# Altium PCB STM32F103&407VET6_1.PcbDoc
Units mil, origin at the board's own origin, x right, y up, seen from the top; angles counter-clockwise.
Board outline 1531.5 x 1531.5 mil, 2 copper layers (Top Layer, Bottom Layer); 23 components, 91 nets, 216 pads, 14 vias.
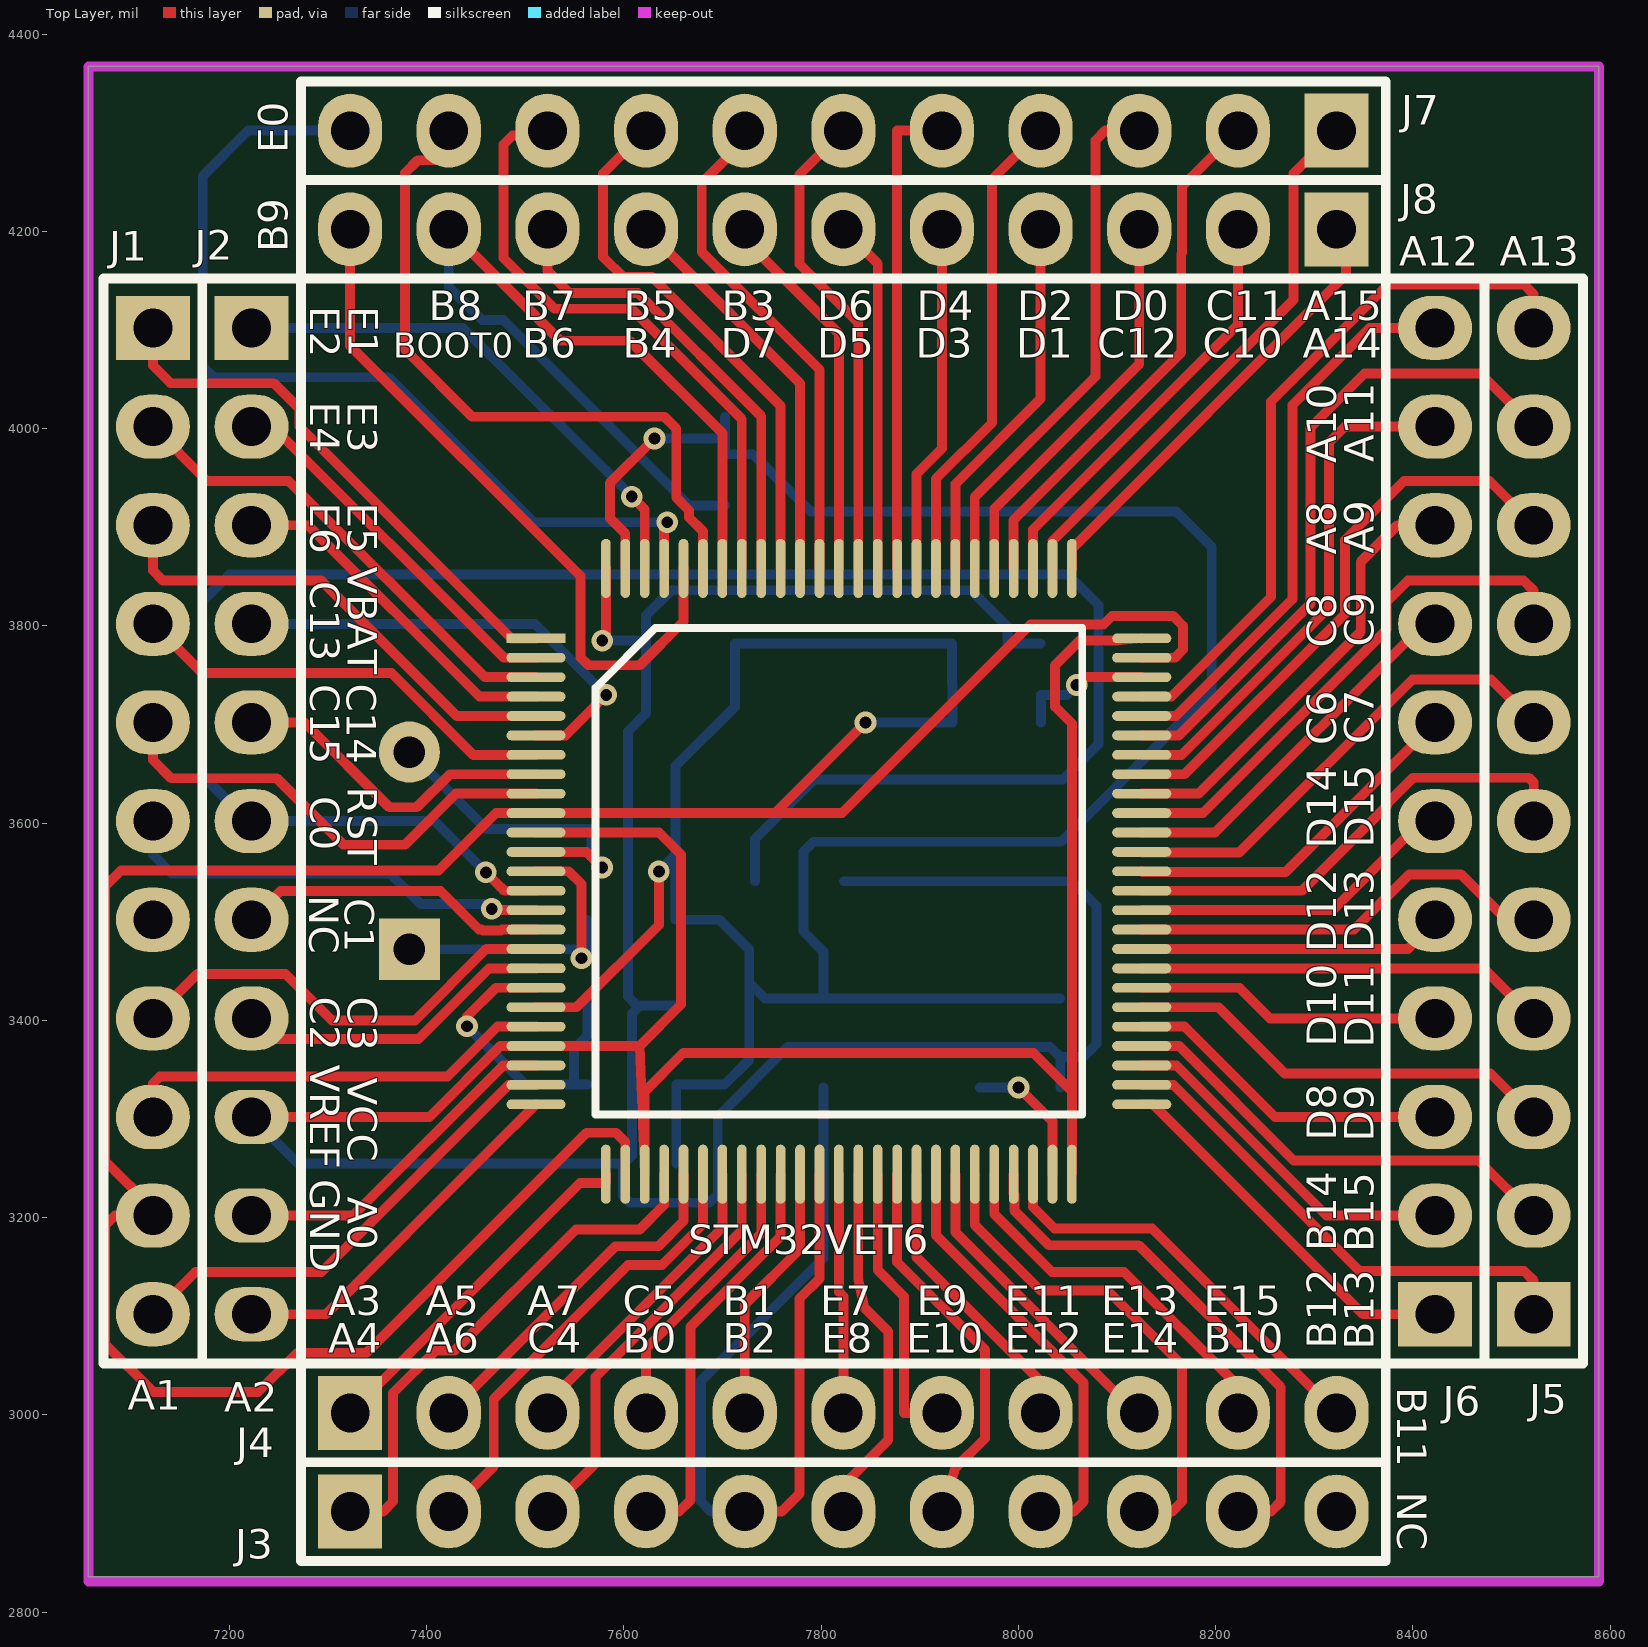
[diagram p0: Top Layer view]
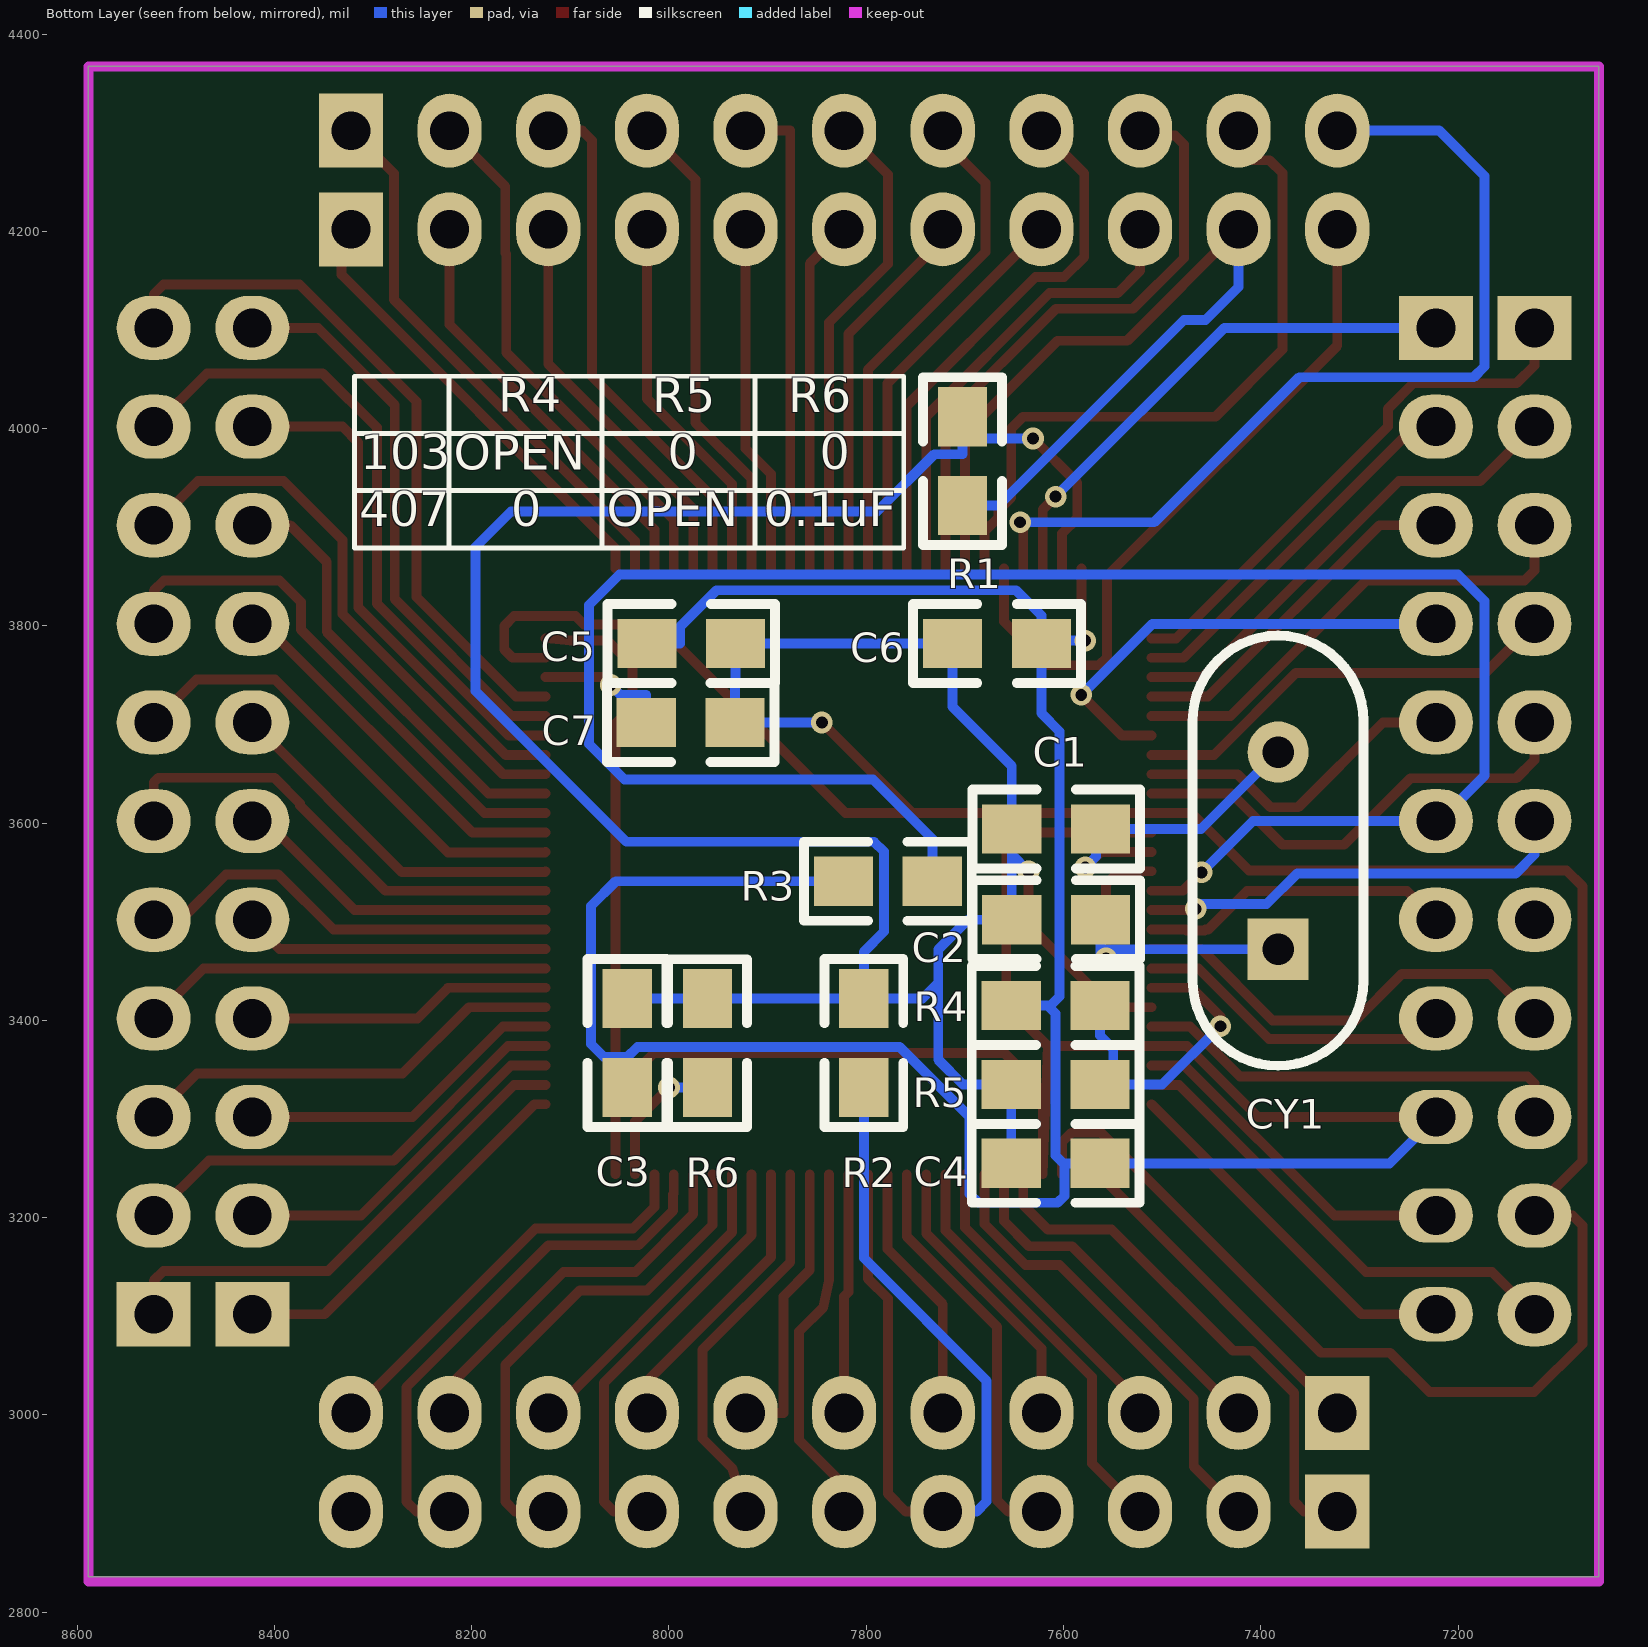
[diagram p1: Bottom Layer view, seen from below]

## Layer stack, top to bottom
Top Solder: solder mask 0.4, Solder Resist, Dk 3.5
Top Layer: signal copper 1.4
Dielectric1: dielectric 12.6, FR-4, Dk 4.8
Bottom Layer: signal copper 1.4
Bottom Solder: solder mask 0.4, Solder Resist, Dk 3.5

## Board outline
7057.09,4367.13 7057.09,2835.63 8588.58,2835.63 8588.58,4367.13

## Design rules (kind name [scope] priority, off if disabled: settings)
Clearance [All] p1: gap=6
FabricationTestPointUsage TestPointUsage [All] p1: valid=0 allowmultiple=FALSE
FabricationTestpoint Testpoint [All] p1: side=3 testpointundercomponent=TRUE minsize=40 maxsize=100 preferedsize=60 minholesize=0 maxholesize=40 preferedholesize=32 testpointgrid=1 allowsidetop=TRUE allowsidebottom=TRUE usegrid=TRUE gridtolerance=0.01
HoleSize [All] p1: absolutevalues=TRUE maxlimit=1000 minlimit=1 maxpercent=80.000 minpercent=20.000
HoleToHoleClearance [All] p1: gap=0 allowstackedmicrovias=TRUE
MinimumSolderMaskSliver [All] p1: minsoldermaskwidth=0
NetAntennae [All] p1: netantennaetolerance=1000
PlaneClearance [All] p1: clearance=10
PlaneConnect [All] p1: planeconnectstyle=Direct reliefexpansion=20 reliefentries=4 reliefconductorwidth=10 reliefairgap=10
PolygonConnect [All] p1: connectstyle=Direct reliefconductorwidth=30 reliefentries=4 polygonreliefangle="90 Angle" airgapwidth=10
RoutingVias [All] p1: holewidth=12 width=22 viastyle="Through Hole" minholewidth=12 minwidth=22 maxholewidth=50 maxwidth=100
ShortCircuit [All] p1: allowed=TRUE
SilkToSilkClearance [All] p1: silktosilkclearance=0
SilkToSolderMaskClearance SilkscreenOverComponentPads [IsPad] p1: minsilkscreentomaskgap=0 clearancetoexposedcopper=TRUE
SolderMaskExpansion [All] p1: expansion=2
Width [All] p1: maxlimit=100 minlimit=9 preferedwidth=10
19 further rules are at their usual default settings.

## Components (designator, comment, footprint, x,y, rotation, side; value= is the part's Value field where it differs from the comment)
C1 "30p" 0805 7562.44,3594.01 r0 bottom locked
C2 "30p" 0805 7562.44,3502.01 r0 bottom locked
C3 "104" 0805 8042.44,3422.01 r270 bottom locked
C4 "104" 0805 7563,3255 r0 bottom locked
C5 "104" 0805 8022.44,3782.01 r180 bottom locked
C6 "104" 0805 7622.44,3782.01 r0 bottom locked
C7 "104" 0805 7933,3702 r0 bottom locked
CY1 "8M" CY1 7382.44,3472.01 r90 bottom locked
J1 "CON11" SIP11#1 7122.44,4102.01 r270 top locked (schematic designator J1-1)
J2 "CON11" SIP11#2 7222.44,4102.01 r270 top locked (schematic designator J)
J3 "CON11" SIP11#1 7322.44,2902.01 r0 top locked
J4 "CON11" SIP11#1 7322.44,3002.01 r0 top locked
J5 "CON11" SIP11#1 8522.44,3102.01 r90 top locked
J6 "CON11" SIP11#1 8422.44,3102.01 r90 top locked
J7 "CON11" SIP11#1 8322.44,4302.01 r180 top locked
J8 "CON11" SIP11#1 8322.44,4202.01 r180 top locked
R1 "10k" 0805 7702.44,3922.01 r90 bottom locked
R2 "10k" 0805 7802.44,3422.01 r270 bottom locked
R3 "10k" 0805 7733,3541 r0 bottom locked
R4 "0" 0805 7563,3415 r0 bottom locked
R5 "0" 0805 7563,3335 r0 bottom locked
R6 "0" 0805 7961,3332 r90 bottom locked
STM32VET6 "Component_1" TQFP100 7510.84,3787.31 r0 top locked

## Footprints (in the part's own frame and the unit in brackets; to place one, negate y for a bottom-side part, rotate by r counter-clockwise, add the part's x,y. Pads: shape width x height; smd on the part's side, far side on the other; paste and mask are expansions set on the pad)
0805 [mil]
  rect 60x50 smd: 1(0,0) 2(90,0)
  silkscreen extent -40,-40 130,40
CY1 [mil]
  rect 62x62 hole 32: 1(0,0)
  round 62 hole 32: 2(200,0)
  silkscreen extent -118,-87 318,87
SIP11#1 [mil]
  rect 65x75 hole 39.37: 1(0,0)
  oval 65x75 hole 39.37: 2(100,0) 3(200,0) 4(300,0) 5(400,0) 6(500,0) 7(600,0) 8(700,0) 9(800,0) 10(900,0) 11(1000,0)
  silkscreen extent -50,-50 1050,50
SIP11#2 [mil]
  rect 65x75 hole 39.37: 1(0,0)
  oval 65x75 hole 39.37: 2(100,0) 3(200,0) 4(300,0) 5(400,0) 6(500,0) 7(600,0) 8(700,0)
  oval 55x75 hole 39.37: 9(800,0) 10(900,0) 11(1000,0)
  silkscreen extent -50,-50 1050,50
TQFP100 [mm]
  rect 1.524x0.25 smd: 1(0,0)
  oval 1.524x0.25 smd: 2(0,-0.5) 3(0,-1) 4(0,-1.5) 5(0,-2) 6(0,-2.5) 7(0,-3) 8(0,-3.5) 9(0,-4) 10(0,-4.5) 11(0,-5) 12(0,-5.5) 13(0,-6) 14(0,-6.5) 15(0,-7) 16(0,-7.5) 17(0,-8) 18(0,-8.5) 19(0,-9) 20(0,-9.5) 21(0,-10) 22(0,-10.5) 23(0,-11) 24(0,-11.5) 25(0,-12) 51(15.6,-12) 52(15.6,-11.5) 53(15.6,-11) 54(15.6,-10.5) 55(15.6,-10) 56(15.6,-9.5) 57(15.6,-9) 58(15.6,-8.5) 59(15.6,-8) 60(15.6,-7.5) 61(15.6,-7) 62(15.6,-6.5) 63(15.6,-6) 64(15.6,-5.5) 65(15.6,-5) 66(15.6,-4.5) 67(15.6,-4) 68(15.6,-3.5) 69(15.6,-3) 70(15.6,-2.5) 71(15.6,-2) 72(15.6,-1.5) 73(15.6,-1) 74(15.6,-0.5) 75(15.6,0)
  oval 0.25x1.524 smd: 26(1.8,-13.8) 27(2.3,-13.8) 28(2.8,-13.8) 29(3.3,-13.8) 30(3.8,-13.8) 31(4.3,-13.8) 32(4.8,-13.8) 33(5.3,-13.8) 34(5.8,-13.8) 35(6.3,-13.8) 36(6.8,-13.8) 37(7.3,-13.8) 38(7.8,-13.8) 39(8.3,-13.8) 40(8.8,-13.8) 41(9.3,-13.8) 42(9.8,-13.8) 43(10.3,-13.8) 44(10.8,-13.8) 45(11.3,-13.8) 46(11.8,-13.8) 47(12.3,-13.8) 48(12.8,-13.8) 49(13.3,-13.8) 50(13.8,-13.8) 76(13.8,1.8) 77(13.3,1.8) 78(12.8,1.8) 79(12.3,1.8) 80(11.8,1.8) 81(11.3,1.8) 82(10.8,1.8) 83(10.3,1.8) 84(9.8,1.8) 85(9.3,1.8) 86(8.8,1.8) 87(8.3,1.8) 88(7.8,1.8) 89(7.3,1.8) 90(6.8,1.8) 91(6.3,1.8) 92(5.8,1.8) 93(5.3,1.8) 94(4.8,1.8) 95(4.3,1.8) 96(3.8,1.8) 97(3.3,1.8) 98(2.8,1.8) 99(2.3,1.8) 100(1.8,1.8)
  silkscreen extent 1.54,-12.26 14.06,0.26

## Part data
C1 C2 C3 C4 C5 C6 C7: library part C1
CY1: library part CY1
R1 R2 R3 R4 R5 R6: library part R1

## Via types
v1: diameter 22, hole 12, Top Layer to Bottom Layer, 14 vias

## Nets (pads, with @x,y where several pads share a name; then routed paths per layer and width w, separated by ;. In a path a pad name is that pad's centre, name@x,y a point inside that pad or via, vN(x,y) a via of type N, cw(c..) or ccw(c..) an arc to the next point about the centre after c; other vN are vias at no path point)
BOOT0: J8.10 R1.1 STM32VET6.94 | length 930.3
  Top Layer w10: J8.10 7535.39,4089.06 7605.94,4089.06 7699.82,3995.18 STM32VET6.94
  Bottom Layer w10: J8.10 7422.44,4143.57 7456,4110.01 7478,4110.01 7666,3922.01 R1.1
GND: C1.2 C2.2 C3.1 C4.2 C5.2 C6.2 C7.1 J1.10 R1.2 R2.1 R5.2 R6.2 STM32VET6.10 STM32VET6.20 STM32VET6.27 STM32VET6.74 STM32VET6.99 | length 5829.7
  Top Layer w10: STM32VET6.20 7552,3413.29 7635.44,3496.73 v1(7635.44,3551) ; STM32VET6.27 7601.39,3276.61 7592,3286 7562,3286 7339,3063 7269,3063 7229,3023 7122.94,3023 7073.94,3072 7073.94,3192 7083.95,3202.01 J1.10 7122.44,3209 7073.94,3257.5 7073.94,3536 7089.94,3552 7412,3552 7470.14,3610.14 STM32VET6.10 7753.14,3610.14 ; STM32VET6.99 7601.39,3893.61 7586,3909 7586,3945 v1(7631,3990) ; v1(7845,3702) 7753.14,3610.14 ; STM32VET6.74 8158.62,3767.62 8167,3776 8167,3800 8157,3810 8094.89,3810 8086.07,3801.17 8012.17,3801.17 7821.14,3610.14 7753.14,3610.14
  Bottom Layer w10: v1(7631,3990) R1.2@7702.44,3990 ; v1(7635.44,3551) 7652.44,3568 ; C4.2 R5.2 7702,3335 7727,3360 7727,3438 ; R1.2 R1.2@7702.44,3990 ; v1(7845,3702) C7.1 7933,3741 7932.44,3741.56 C5.2 C6.2 7712.44,3718 7652.44,3658 C1.2 7652.44,3568 ; C3.1 8001.01,3422.01 R6.2 7881.01,3422 R2.1 ; 7652.44,3568 C2.2 7696.99,3502.01 7727,3472 7727,3438 ; R1.2@7702.44,3990 7702.44,3974 7731,3974 7789,3916 8160,3916 8196,3880 8196,3734 8043,3581 7792,3581 7782,3571 7782,3490 7802.44,3469.56 R2.1 ; 7727,3438 7742.99,3422.01 R2.1
NetC1_1: C1.1 CY1.2 STM32VET6.12 | length 334.1
  Top Layer w10: STM32VET6.12 7562.23,3570.77 v1(7578,3555)
  Bottom Layer w10: CY1.2 7460.44,3594.01 C1.1 7567,3594.01 7567,3566 v1(7578,3555)
NetC2_1: C2.1 CY1.1 STM32VET6.13 | length 347.9
  Top Layer w10: STM32VET6.13 7544,3551.09 7557,3538.09 v1(7557,3463)
  Bottom Layer w10: CY1.1 v1@7562.44,3472.01 ; v1(7557,3463) 7562.44,3468.44 v1@7562.44,3472.01 ; C2.1 v1@7562.44,3472.01
NetC7_2: C7.2 STM32VET6.73 | length 137.4
  Top Layer w10: v1(8059,3740) 8066.94,3747.94 STM32VET6.73
  Bottom Layer w10: C7.2 8023,3730 8049,3730 v1(8059,3740)
NetR4_1: R4.1 R5.1 STM32VET6.19 | length 323.9
  Top Layer w10: v1(7440.98,3394) 7440.98,3403.96 7470,3432.98 STM32VET6.19
  Bottom Layer w10: v1(7440.98,3394) 7499.98,3335 R5.1@7549.5,3335 ; R5.1 R5.1@7549.5,3335 ; R4.1 7563,3384.49 7549.5,3370.99 R5.1@7549.5,3335
NetR6_1: R6.1 STM32VET6.49 | length 141.3
  Top Layer w10: v1(8000,3332) 8034.46,3297.54 STM32VET6.49
  Bottom Layer w10: R6.1 v1(8000,3332)
PA0: J2.10 STM32VET6.23 | length 351.5
  Top Layer w10: J2.10 7325.35,3202.01 7477.58,3354.24 STM32VET6.23
PA1: J1.11 STM32VET6.24 | length 509.7
  Top Layer w10: J1.11@7122.44,3127 J1.11 7165.43,3145 7293.38,3145 7482.93,3334.55 STM32VET6.24
PA2: J2.11 STM32VET6.25 | length 376.6
  Top Layer w10: J2.11 7298,3102.01 7463.87,3267.88 STM32VET6.25
PA3: J4.1 STM32VET6.26 | length 364.8
  Top Layer w10: J4.1 7555.43,3235 7581.71,3235 STM32VET6.26
PA4: J3.1 STM32VET6.29 | length 542.7
  Top Layer w10: J3.1 7356.01,2902.01 7366,2912 7366,3022 7408.99,3064.99 7428.26,3064.99 7551.27,3188 7616,3188 7640.76,3212.76 STM32VET6.29
PA5: J4.2 STM32VET6.30 | length 366.1
  Top Layer w10: J4.2 7591.43,3171 7635,3171 7660.45,3196.45 STM32VET6.30
PA6: J3.2 STM32VET6.31 | length 469
  Top Layer w10: J3.2 7468,2947.57 7468,3016 7604,3152 7638.63,3152 7680.13,3193.5 STM32VET6.31
PA7: J4.3 STM32VET6.32 | length 340
  Top Layer w10: J4.3 7522.44,3012.51 7699.82,3189.89 STM32VET6.32
  Bottom Layer w10: J4.3 J4.3@7547,3002.01
PA8: J6.9 STM32VET6.67 | length 451.8
  Top Layer w10: STM32VET6.67 8182.83,3629.83 8347,3794 8347,3865.01 8384,3902.01 J6.9
PA9: J5.9 STM32VET6.68 | length 612.3
  Top Layer w10: STM32VET6.68@8154.17,3649.51 STM32VET6.68 8168.39,3649.51 8331,3812.12 8331,3887 8391,3947 8477.45,3947 J5.9
PA10: J6.10 STM32VET6.69 | length 533.3
  Top Layer w10: STM32VET6.69 8165.45,3669.2 8315,3818.75 8315,3986 8331.01,4002.01 J6.10
PA11: J5.10 STM32VET6.70 | length 683.9
  Top Layer w10: STM32VET6.70 8162.51,3688.88 8296,3822.37 8296,4001 8351,4056 8468.45,4056 J5.10 J5.10@8515.01,4002.01
PA12: J6.11 STM32VET6.71 | length 575.8
  Top Layer w10: STM32VET6.71 8159.57,3708.57 8278,3827 8278,4024 8356.01,4102.01 J6.11
PA13: J5.11 STM32VET6.72 | length 724.7
  Top Layer w10: STM32VET6.72 8155.01,3728.25 8256,3829.24 8256,4027.37 8374.63,4146 8512.44,4146 8522.44,4136 J5.11
PA14: J8.1 STM32VET6.76 | length 468.5
  Top Layer w10: STM32VET6.76 8054.15,3878.15 8332,4156 8332,4202.01 J8.1
PA15: J7.1 STM32VET6.77 | length 563.1
  Top Layer w10: STM32VET6.77 8034.46,3886.08 8278.94,4130.56 8278.94,4258.51 J7.1
PB0: J3.4 STM32VET6.35 | length 418.2
  Top Layer w10: J3.4 7656.01,2902.01 7667.43,2913.43 7667.43,3089.27 7758.87,3180.71 STM32VET6.35
PB1: J4.5 STM32VET6.36 | length 265.2
  Top Layer w10: J4.5 7722.44,3112.18 7778.56,3168.3 STM32VET6.36
PB2: J3.5 R2.2 STM32VET6.37 | length 915.5
  Top Layer w10: J3.5 7760.01,2902.01 7778,2920 7778,3117.82 7798.24,3138.06 STM32VET6.37
  Bottom Layer w10: J3.5 7687.99,2902.01 7678,2912 7678,3034.56 7802.44,3159 R2.2
PB3: J7.7 STM32VET6.89 | length 511.3
  Top Layer w10: J7.7 7722.44,4292.44 7678.94,4248.94 7678.94,4178.99 7798.24,4059.69 STM32VET6.89
PB4: J8.8 STM32VET6.90 | length 408.5
  Top Layer w10: J8.8 7778.56,4045.89 STM32VET6.90
PB5: J7.8 STM32VET6.91 | length 553.4
  Top Layer w10: J7.8 7578.94,4258.51 7578.94,4174.06 7599.49,4153.51 7628.49,4153.51 7758.87,4023.13 STM32VET6.91
PB6: J8.9 STM32VET6.92 | length 474.2
  Top Layer w10: J8.9 7522.44,4160 7544.93,4137.51 7614.15,4137.51 7739.19,4012.47 STM32VET6.92
PB7: J7.9 STM32VET6.93 | length 628.7
  Top Layer w10: J7.9 7522.44,4297 7487,4297 7478,4288 7478,4173 7529.49,4121.51 7607.49,4121.51 7719.5,4009.5 STM32VET6.93
PB8: J7.10 STM32VET6.95 | length 720
  Top Layer w10: J7.10 7422.44,4272 7391,4272 7378,4259 7378,4080 7446,4012 7641,4012 7653,4000 7653,3930 7666,3917 7666,3910 7680.13,3895.87 STM32VET6.95
PB9: J8.11 STM32VET6.96 | length 710.6
  Top Layer w10: J8.11 7322.44,4084 7556,3850.44 7556,3768 7564,3760 7616,3760 7660.45,3804.45 STM32VET6.96
PB10: J3.10 STM32VET6.47 | length 545.2
  Top Layer w10: STM32VET6.47 7995.09,3224.5 7996,3223.59 7996,3207 8031,3172 8122,3172 8265.94,3028.06 8265.94,2911.95 8256,2902.01 J3.10
PB11: J4.11 STM32VET6.48 | length 427.3
  Top Layer w10: STM32VET6.48 8014.78,3210.85 8036.63,3189 8135.45,3189 J4.11
PB12: J6.1 STM32VET6.51 | length 385.6
  Top Layer w10: STM32VET6.51 8136.53,3314.87 8349.39,3102.01 J6.1
PB13: J5.1 STM32VET6.52 | length 513.7
  Top Layer w10: STM32VET6.52 8157.19,3334.55 8345.74,3146 8512.44,3146 8522.44,3136 J5.1
PB14: J6.2 STM32VET6.53 | length 360.5
  Top Layer w10: STM32VET6.53 8160.13,3354.24 8312.36,3202.01 J6.2
PB15: J5.2 STM32VET6.54 | length 468.6
  Top Layer w10: STM32VET6.54 8163.08,3373.92 8279,3258 8466.45,3258 J5.2
PC0: J1.6 STM32VET6.15 | length 445.7
  Top Layer w10: v1(7466,3513) 7467.28,3511.72 STM32VET6.15
  Bottom Layer w10: J1.6 7122.44,3568 7141.44,3549 7363,3549 7394,3518 7461,3518 v1(7466,3513)
PC1: J2.7 STM32VET6.16 | length 317.6
  Top Layer w10: J2.7 7251.65,3531.21 7414,3531.21 7453.18,3492.03 7455.86,3492.03 7456.89,3491 7475.11,3491 7476.14,3492.03 STM32VET6.16
PC2: J1.8 STM32VET6.17 | length 456.5
  Top Layer w10: J1.8 7167.43,3447 7257,3447 7304,3400 7387.99,3400 7460.34,3472.35 STM32VET6.17
PC3: J2.8 STM32VET6.18 | length 326.8
  Top Layer w10: J2.8 7243.45,3381 7391.62,3381 7463.28,3452.66 STM32VET6.18
PC4: J3.3 STM32VET6.33 | length 454.6
  Top Layer w10: J3.3 7571,2950.57 7571,3038.44 7719.5,3186.94 STM32VET6.33
  Bottom Layer w10: J3.3@7522.44,2871 J3.3
PC5: J4.4 STM32VET6.34 | length 290.4
  Top Layer w10: J4.4 7622.44,3067.25 7739.19,3184 STM32VET6.34
PC6: J6.7 STM32VET6.63 | length 360.4
  Top Layer w10: STM32VET6.63 8125.53,3550.57 8271,3550.57 J6.7
PC7: J5.7 STM32VET6.64 | length 488.5
  Top Layer w10: STM32VET6.64 8125.78,3570 8223.91,3570 8399.42,3745.51 8478.94,3745.51 J5.7
PC8: J6.8 STM32VET6.65 | length 385.1
  Top Layer w10: STM32VET6.65 8199.46,3590.46 8411.01,3802.01 J6.8
PC9: J5.8 STM32VET6.66 | length 549.4
  Top Layer w10: STM32VET6.66 8187.14,3610.14 8373,3796 8373,3824 8395,3846 8512,3846 8522.44,3835.56 J5.8
PC10: J8.2 STM32VET6.78 | length 429.9
  Top Layer w10: STM32VET6.78 8014.78,3897.78 8222.44,4105.44 J8.2
PC11: J7.2 STM32VET6.79 | length 538
  Top Layer w10: STM32VET6.79 7995.09,3907.09 8165,4077 8165,4177.11 8165.94,4178.05 8165.94,4245.51 J7.2
PC12: J8.3 STM32VET6.80 | length 404.7
  Top Layer w10: STM32VET6.80 7975.41,3918.26 8122.44,4065.29 J8.3
PC13: J1.4 STM32VET6.7 | length 443.4
  Top Layer w10: J1.4 7172.44,3752 7364.47,3752 7447.27,3669.2 STM32VET6.7
PC14: J2.5 STM32VET6.8 | length 337.9
  Top Layer w10: J2.5 7275.99,3702.01 7362,3616 7390,3616 7423.51,3649.51 STM32VET6.8
PC15: J1.5 STM32VET6.9 | length 483.5
  Top Layer w10: J1.5 7122.44,3664 7140.93,3645.51 7248,3645.51 7315.51,3578 7378,3578 7429.83,3629.83 STM32VET6.9
PD0: J7.3 STM32VET6.81 | length 533.1
  Top Layer w10: STM32VET6.81 7955.72,3930.67 8078,4052.95 8078,4292.01 8088,4302.01 J7.3
PD1: J8.4 STM32VET6.82 | length 379.6
  Top Layer w10: STM32VET6.82 7936.04,3943.85 8022.44,4030.26 J8.4
PD2: J7.4 STM32VET6.83 | length 487.8
  Top Layer w10: STM32VET6.83 7916.35,3949.17 7973,4005.82 7973,4252.57 J7.4
PD3: J8.5 STM32VET6.84 | length 354.5
  Top Layer w10: STM32VET6.84 7896.67,3954 7922.44,3979.77 J8.5
PD4: J7.5 STM32VET6.85 | length 489.3
  Top Layer w10: STM32VET6.85 7876.98,4301.99 J7.5
PD5: J8.6 STM32VET6.86 | length 358.3
  Top Layer w10: J8.6 7857.3,4167.15 STM32VET6.86
PD6: J7.6 STM32VET6.87 | length 486.9
  Top Layer w10: J7.6 7778,4257.57 7778,4167 7837.61,4107.39 STM32VET6.87
PD7: J8.7 STM32VET6.88 | length 383.4
  Top Layer w10: J8.7 7722.44,4191.56 7817.93,4096.07 STM32VET6.88
PD8: J6.3 STM32VET6.55 | length 335.4
  Top Layer w10: STM32VET6.55 8168.4,3393.61 8260,3302.01 J6.3
PD9: J5.3 STM32VET6.56 | length 443.5
  Top Layer w10: STM32VET6.56 8202.75,3413.29 8270.04,3346 8478.45,3346 J5.3
PD10: J6.4 STM32VET6.57 | length 310.3
  Top Layer w10: STM32VET6.57 8224,3432.98 8254.97,3402.01 J6.4
PD11: J5.4 STM32VET6.58 | length 418.4
  Top Layer w10: STM32VET6.58 8471.79,3452.66 J5.4
PD12: J6.5 STM32VET6.59 | length 310.9
  Top Layer w10: STM32VET6.59 8394.79,3472.35 8422.44,3500 J6.5
PD13: J5.5 STM32VET6.60 | length 439.7
  Top Layer w10: STM32VET6.60 8340.24,3492.03 8396.21,3548 8449,3548 8494.99,3502.01 J5.5
PD14: J6.6 STM32VET6.61 | length 334.8
  Top Layer w10: STM32VET6.61 8318.72,3511.72 8409.01,3602.01 J6.6
PD15: J5.6 STM32VET6.62 | length 487.2
  Top Layer w10: STM32VET6.62 8287.4,3531.4 8373.94,3617.94 8373.94,3620.03 8399.91,3646 8517.44,3646 8522.44,3641 J5.6
PE0: J7.11 STM32VET6.97 | length 946.1
  Top Layer w10: STM32VET6.97 7640.76,3901.76 v1(7644,3905)
  Bottom Layer w10: J7.11 7219.01,4302.01 7173,4256 7173,4063 7184,4052 7361,4052 7508,3905 v1(7644,3905)
PE1: J2.1 STM32VET6.98 | length 534.6
  Top Layer w10: v1(7608,3931) 7621.08,3917.92 STM32VET6.98
  Bottom Layer w10: J2.1 7436.99,4102.01 v1(7608,3931)
PE2: J1.1 STM32VET6.1 | length 551.5
  Top Layer w10: J1.1 7122.44,4064 7140.44,4046 7244.97,4046 7270.94,4020.03 7270.94,4002.21 7485.84,3787.31 STM32VET6.1
PE3: J2.2 STM32VET6.2 | length 385.5
  Top Layer w10: J2.2 7243.83,4002.01 7478.22,3767.62 STM32VET6.2
PE4: J1.2 STM32VET6.3 | length 493.6
  Top Layer w10: J1.2 7177.45,3947 7259.88,3947 7458.94,3747.94 STM32VET6.3
PE5: J2.3 STM32VET6.4 | length 360.4
  Top Layer w10: J2.3 7279.75,3902.01 7453.51,3728.25 STM32VET6.4
PE6: J1.3 STM32VET6.5 | length 495.5
  Top Layer w10: J1.3 7122.44,3856 7132.44,3846 7293.1,3846 7430.53,3708.57 STM32VET6.5
PE7: J4.6 STM32VET6.38 | length 243.9
  Top Layer w10: STM32VET6.38 7817.93,3124.51 7822.44,3120 J4.6
PE8: J3.6 STM32VET6.39 | length 371.6
  Top Layer w10: J3.6 7822.44,2929 7868,2974.56 7868,3084.5 7843.59,3108.91 7837.61,3137.39 STM32VET6.39
PE9: J4.7 STM32VET6.40 | length 291.5
  Top Layer w10: STM32VET6.40 7857.3,3146.7 7884,3120 7884,3002.01 J4.7
PE10: J3.7 STM32VET6.41 | length 393.3
  Top Layer w10: STM32VET6.41 7876.98,3155.03 7965.94,3066.07 7965.94,2976 7935.94,2946 J3.7
PE11: J4.8 STM32VET6.42 | length 294.1
  Top Layer w10: STM32VET6.42 7896.67,3159.83 8022.44,3034.06 J4.8
PE12: J3.8 STM32VET6.43 | length 441.6
  Top Layer w10: STM32VET6.43 7916.35,3182.16 8065.94,3032.57 8065.94,2911.95 8056,2902.01 J3.8
PE13: J4.9 STM32VET6.44 | length 321.1
  Top Layer w10: STM32VET6.44 7936.04,3185.1 8119.13,3002.01 J4.9
PE14: J3.9 STM32VET6.45 | length 506.7
  Top Layer w10: STM32VET6.45 7955.72,3192.5 8022.22,3126 8090.45,3126 8165.94,3050.51 8165.94,2912 8155.95,2902.01 J3.9
PE15: J4.10 STM32VET6.46 | length 387.1
  Top Layer w10: STM32VET6.46 7975.41,3203.59 8034,3145 8107,3145 8222.44,3029.56 J4.10
RST: J2.6 R3.1 STM32VET6.14 | length 2067.7
  Top Layer w10: v1(7460,3550) 7475,3535 7475.11,3535 7478.71,3531.4 STM32VET6.14
  Bottom Layer w10: J2.6@7222.29,3601.29 J2.6 ; v1(7460,3550) 7408,3602 J2.6 ; R3.1 7733,3584 7793,3644 8045,3644 8081,3680 8081,3821 8050,3852 7200,3852 7173,3825 7173,3648 7219,3602 J2.6
VBAT: J2.4 STM32VET6.6 | length 477.6
  Top Layer w10: STM32VET6.6 7540.88,3688.88 v1(7582,3730)
  Bottom Layer w10: J2.4 7509.99,3802.01 v1(7582,3730)
VCC: C3.2 C4.1 C5.1 C6.1 J2.9 R3.2 R4.2 STM32VET6.11 STM32VET6.22 STM32VET6.28 STM32VET6.50 STM32VET6.75 STM32VET6.100 | length 4739
  Top Layer w10: J2.9 7402.73,3302.01 7474.64,3373.92 STM32VET6.22 7616,3373.92 ; STM32VET6.11 7635.54,3590.46 7658,3568 7658,3415.92 7616,3373.92 ; v1(7578,3785) 7581.71,3788.71 STM32VET6.100 ; STM32VET6.50 8054.15,3328 ; STM32VET6.75 8099.93,3785.17 8062.17,3785.17 8037,3760 8037,3718.01 8054.15,3700.86 8054.15,3328 ; 7616,3373.92 STM32VET6.28 7621.08,3328 7660.08,3367 8015.15,3367 8054.15,3328
  Bottom Layer w10: J2.9 7269.45,3255 C4.1 7599,3255 ; v1(7578,3785) C6.1@7622.44,3785 ; R4.2 7616,3415 ; R3.2 8054,3541 8079,3516 8079,3376 8066,3363 8042.44,3363 8042.44,3362.57 ; C5.1 7988.99,3782.01 7988.99,3799.01 7952,3836 7648,3836 7622.44,3810.44 C6.1@7622.44,3785 ; C3.2 8042.44,3362.57 ; 7599,3255 7599,3222 7606,3215 7686.19,3215 7695.19,3224 7695.19,3302.19 7766,3373.01 8032,3373.01 8042.44,3362.57 ; 7599,3255 7600,3255 7608,3263 7608,3407 7616,3415 ; 7616,3415 7613,3415 7604,3424 7604,3692.94 7622.44,3711.38 C6.1 C6.1@7622.44,3785
VREF+: J1.9 STM32VET6.21 | length 446.3
  Top Layer w10: J1.9 7122.44,3336 7129.44,3343 7421.09,3343 7471.7,3393.61 STM32VET6.21
pads on no net: J1.7 J3.11

## Keep-outs
Keep-Out Layer:
  lines w10: 7057.09,2831 8588.58,2831 8588.58,4367.13 7057.09,4367.13 7057.09,2831

## Silkscreen, mask and mechanical layers (free items; w line width, h text height)
Top Overlay:
  text "E0" at 7259,4279 h30 r90
  text "B9" at 7259,4179 h30 r90
  text "A12" at 8386,4165 h30
  text "A13" at 8488,4165 h30
  text "E2" at 7282,4124 h30 r270
  text "E1" at 7321,4124 h30 r270
  text "B8" at 7402,4110 h30
  text "B7" at 7497,4110 h30
  text "B5" at 7600,4110 h30
  text "B3" at 7699,4110 h30
  text "D6" at 7796,4110 h30
  text "D4" at 7897,4110 h30
  text "D2" at 7999,4110 h30
  text "D0" at 8095,4110 h30
  text "C11" at 8190,4110 h30
  text "A15" at 8288,4110 h30
  text "BOOT0" at 7366,4072 h25
  text "B6" at 7497,4072 h30
  text "B4" at 7599,4072 h30
  text "D7" at 7698,4072 h30
  text "D5" at 7796,4072 h30
  text "D3" at 7896,4072 h30
  text "D1" at 7998,4072 h30
  text "C12" at 8080,4072 h30
  text "C10" at 8187,4072 h30
  text "A14" at 8288,4072 h30
  text "E4" at 7282,4027 h30 r270
  text "E3" at 7320,4027 h30 r270
  text "A11" at 8360,3966 h30 r90
  text "A10" at 8322,3965 h30 r90
  text "E6" at 7282,3925 h30 r270
  text "E5" at 7320,3925 h30 r270
  text "A9" at 8360,3873 h30 r90
  text "A8" at 8322,3872 h30 r90
  text "VBAT" at 7320,3860 h30 r270
  text "C13" at 7282,3845 h30 r270
  text "C9" at 8360,3779 h30 r90
  text "C8" at 8322,3778 h30 r90
  text "C15" at 7282,3741 h30 r270
  text "C14" at 7319,3741.04 h30 r270
  text "C7" at 8360,3680 h30 r90
  text "C6" at 8322,3679 h30 r90
  text "RST" at 7320,3637 h30 r270
  text "C0" at 7282,3627 h30 r270
  text "D15" at 8360,3575 h30 r90
  text "D14" at 8322,3574 h30 r90
  text "NC" at 7281,3527 h30 r270
  text "C1" at 7317,3524 h30 r270
  text "D12" at 8322,3469 h30 r90
  text "D13" at 8360,3469 h30 r90
  text "C2" at 7282,3424 h30 r270
  text "C3" at 7320,3424 h30 r270
  text "D10" at 8322,3373 h30 r90
  text "D11" at 8360,3372 h30 r90
  text "VREF" at 7282,3355 h30 r270
  text "VCC" at 7320,3342 h30 r270
  text "D8" at 8322,3278 h30 r90
  text "D9" at 8360,3277 h30 r90
  text "GND" at 7282,3239 h30 r270
  text "A0" at 7320,3221 h30 r270
  text "B14" at 8322,3166 h30 r90
  text "B15" at 8360,3165 h30 r90
  text "A3" at 7300,3101 h30
  text "A5" at 7399,3101 h30
  text "A7" at 7502,3101 h30
  text "C5" at 7599,3101 h30
  text "B1" at 7700,3101 h30
  text "E7" at 7799,3101 h30
  text "E9" at 7897,3101 h30
  text "E11" at 7986,3101 h30
  text "E13" at 8084,3101 h30
  text "E15" at 8188,3101 h30
  text "B12" at 8322,3067 h30 r90
  text "B13" at 8360,3066 h30 r90
  text "A4" at 7300,3063 h30
  text "A6" at 7399,3063 h30
  text "C4" at 7502,3063 h30
  text "B0" at 7599,3063 h30
  text "B2" at 7700,3063 h30
  text "E8" at 7800,3063 h30
  text "E10" at 7886,3063 h30
  text "E12" at 7986,3063 h30
  text "E14" at 8084,3063 h30
  text "B10" at 8188,3063 h30
  text "B11" at 8384,3028 h30 r270
  text "A1" at 7097,3005 h30
  text "A2" at 7195,3003 h30
  text "NC" at 8384,2922 h30 r270
Bottom Overlay:
  lines w5: 7762,3995 8319,3995 ; 7763,3937 8319,3937 ; 7913,3879 7913,4053 ; 8068,3879 8068,4053 ; 8223,3879 8223,4053 ; 7762,3879 8319,3879 8319,4053 7762,4053 7762,3879
  text "R6" at 7879,4005 h60
  text "R5" at 8017,4005 h60
  text "R4" at 8173,4005.18 h60
  text "0" at 7847,3947 h60
  text "0" at 8001,3947 h60
  text "OPEN" at 8218,3946.53 h60
  text "103" at 8313,3947 h60
  text "0.1uF" at 7904,3889.47 h60
  text "OPEN" at 8063,3889.47 h60
  text "0" at 8160,3889.47 h60
  text "407" at 8314,3889.47 h60